# Altium PCB Final_Project.PcbDoc
Units mil, origin at the board's own origin, x right, y up, seen from the top; angles counter-clockwise.
Board outline 5410 x 3885 mil, 2 copper layers (Top Layer, Bottom Layer); 34 components, 37 nets, 146 pads, 0 vias.
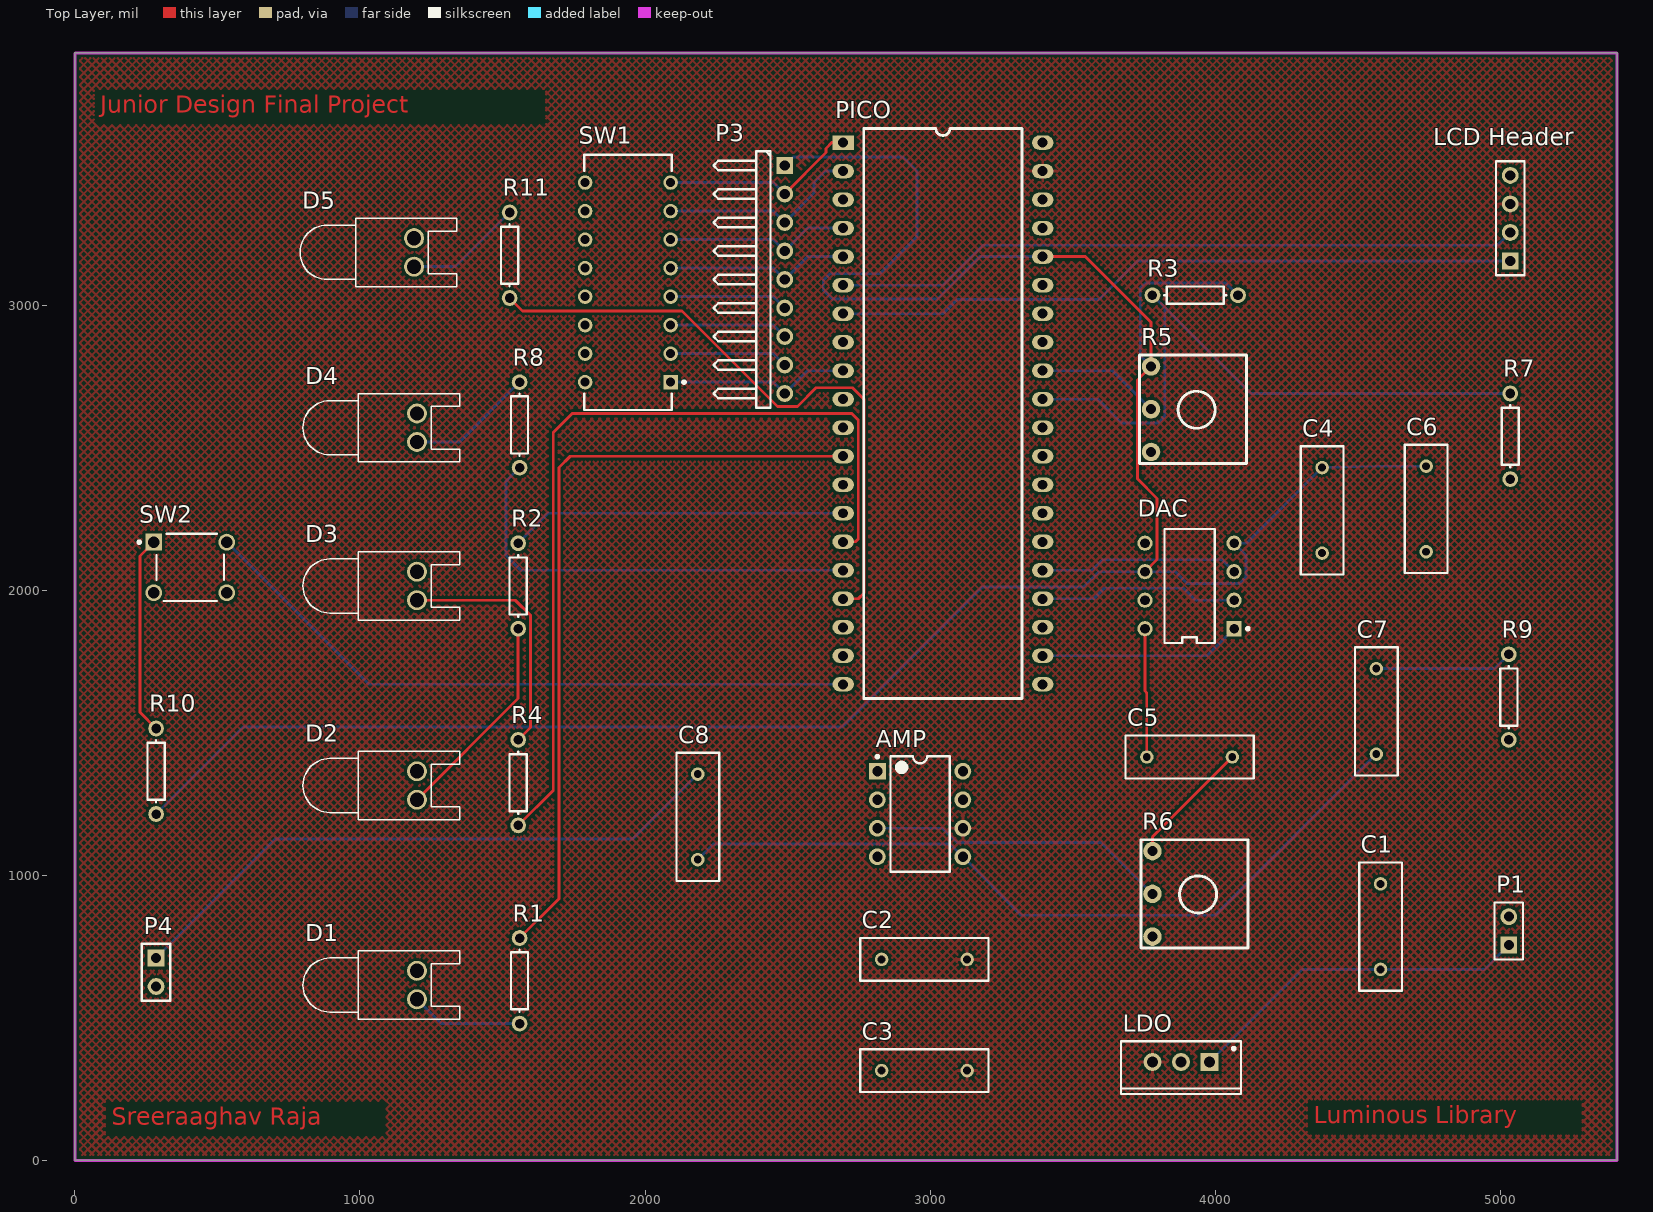
[diagram p0: Top Layer view]
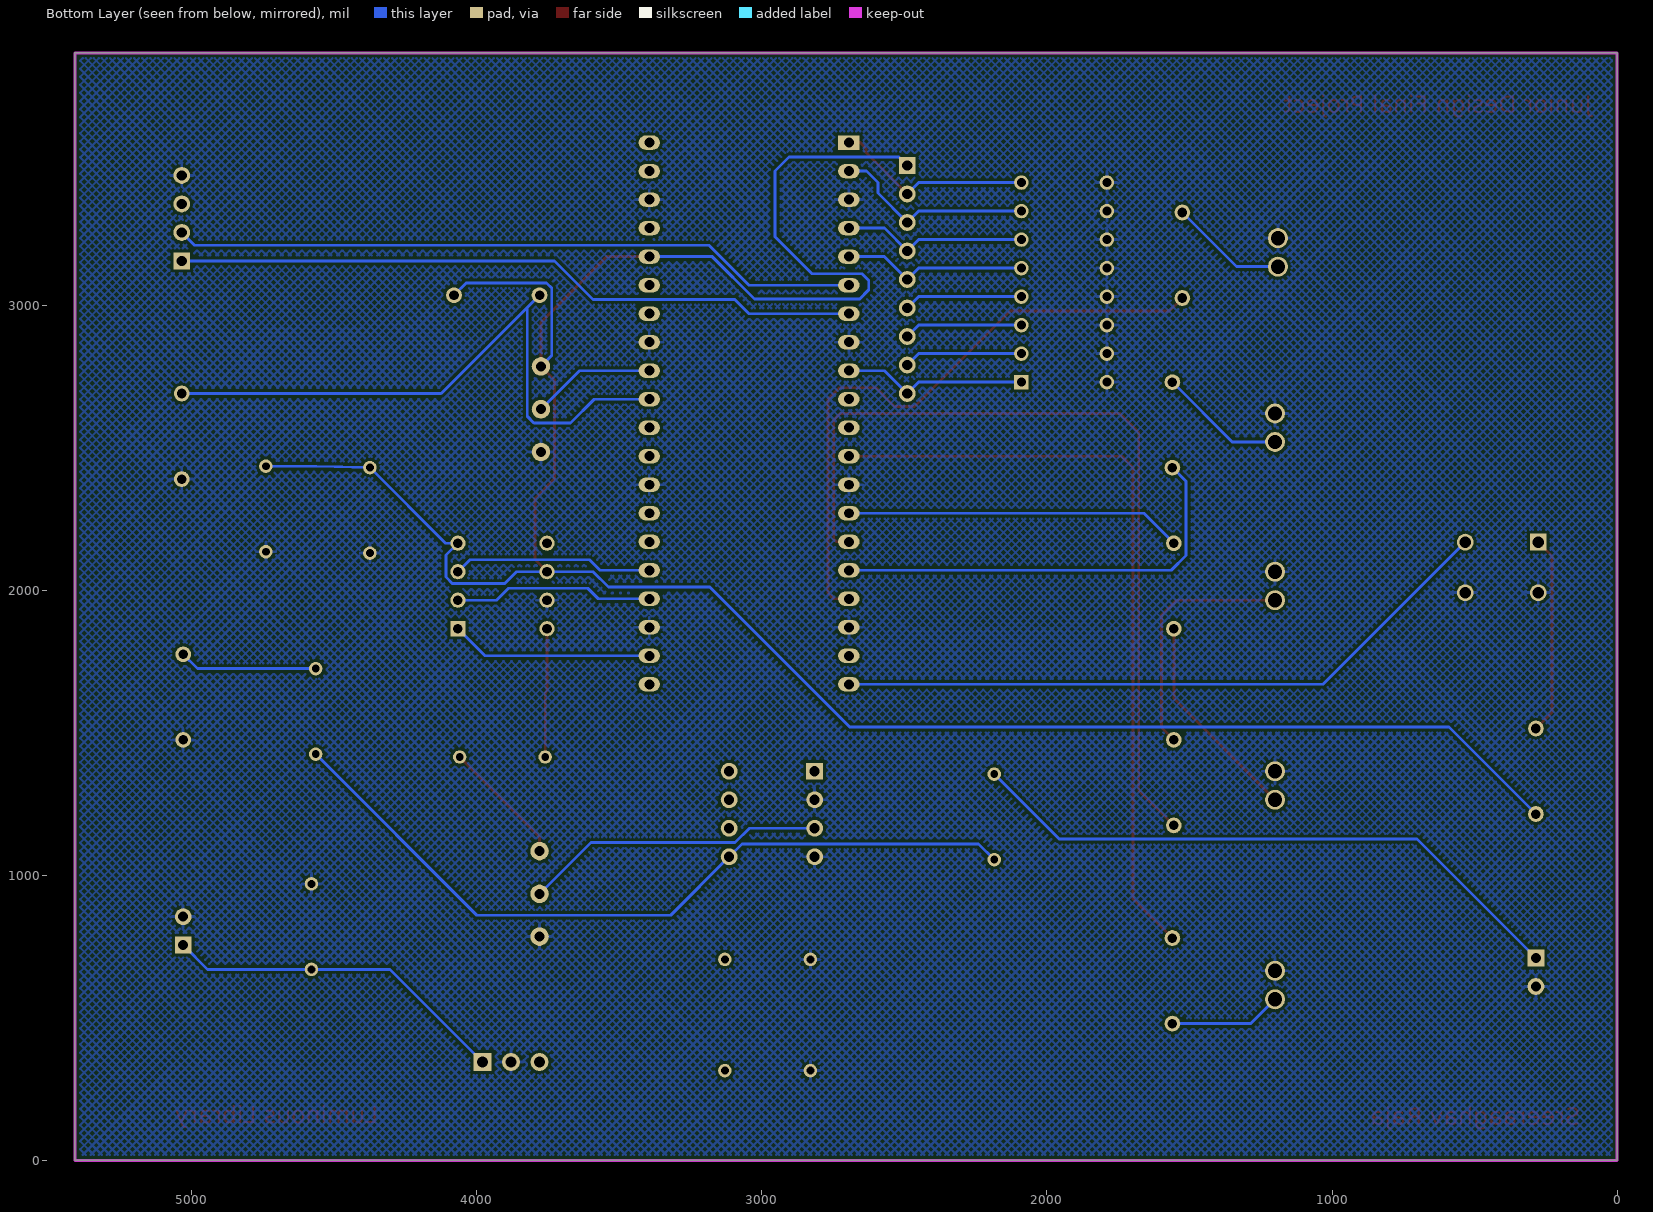
[diagram p1: Bottom Layer view, seen from below]

## Layer stack, top to bottom
Top Solder: solder mask 0.4, Solder Resist, Dk 3.5
Top Layer: signal copper 1.4
Dielectric 1: dielectric 12.6, FR-4, Dk 4.8
Bottom Layer: signal copper 1.4
Bottom Solder: solder mask 0.4, Solder Resist, Dk 3.5

## Board outline
0,0 5410,0 5410,3885 0,3885

## Design rules (kind name [scope] priority, off if disabled: settings)
Clearance [All] p1: gap=10 ignorepadtopadclearanceinfootprint=FALSE
PolygonConnect [All] p1: connectstyle=Relief reliefconductorwidth=10 reliefentries=4 polygonreliefangle="90 Angle" airgapwidth=10
RoutingVias [All] p1: holewidth=28 width=50 viastyle="Through Hole" minholewidth=28 minwidth=50 maxholewidth=28 maxwidth=50
SolderMaskExpansion [All] p1: expansion=0 istentingtop=FALSE
SupplyNets "Schematic Supply Nets_1" [InNet('9V_PORT')] p1: voltage=0.000
SupplyNets "Schematic Supply Nets" [InNet('GND_PORT')] p2: voltage=0.000
Width [All] p1: maxlimit=10 minlimit=10 preferedwidth=10
30 further rules are at their usual default settings.

## Components (designator, comment, footprint, x,y, rotation, side; value= is the part's Value field where it differs from the comment)
AMP "LM386N-1" DIP-8 2965,1215 r0 top (schematic designator U4)
C1 "Cap" RAD-0.3 4580,820 r270 top value=0.47uF
C2 "Cap" RAD-0.3 2980,705 r0 top value=10uF
C3 "Cap" RAD-0.3 2980,315 r0 top value=10uF
C4 "Cap" RAD-0.3 4375,2280 r90 top value=0.1uF
C5 "Cap" RAD-0.3 3910,1415 r180 top value=1000uF
C6 "Cap" RAD-0.3 4740,2285 r90 top value=0.1uF
C7 "Cap" RAD-0.3 4565,1575 r270 top value=0.47uF
C8 "Cap" RAD-0.3 2185,1205 r270 top value=270uF
D1 "LED0" LED-0 1200,615 r270 top
D2 "LED0" LED-0 1200,1315 r270 top
D3 "LED0" LED-0 1200,2015 r270 top
D4 "LED0" LED-0 1200,2570 r270 top
D5 "LED0" LED-0 1190,3185 r270 top
DAC "LTC1661IN8#PBF" FP-N-8-05-08-1510-MFG 3910,2015 r180 top (schematic designator U3)
"LCD Header" "LCD" HDR1X4 5035,3155 r90 top (schematic designator P2)
LDO "LM2940CT-3.3" T03B 3880,345 r180 top (schematic designator U2)
P1 "Battery Headers" HDR1X2 5030,755 r90 top
P3 "Header 9H" HDR1X9H 2490,3490 r270 top
P4 "8ohm_Speaker" HDR1X2 285,710 r270 top
PICO "Raspberry Pi Pico" "Raspberry Pi Pico" 2695,3570 r0 top (schematic designator U1)
R1 "LD" AXIAL-0.3 1560,630 r90 top value=2.2k
R2 "LD" AXIAL-0.3 1555,2015 r90 top value=2.2k
R3 "PHO" AXIAL-0.3 3930,3035 r0 top value=10K
R4 "LD" AXIAL-0.3 1555,1325 r270 top value=2.2k
R5 "RPot_1" "POT inline wide" 3775,2735 r270 top value=10K
R6 "RPot_1" "POT inline wide" 3780,1035 r270 top value=10K
R7 "Res1" AXIAL-0.3 5035,2540 r90 top value=10K
R8 "LD" AXIAL-0.3 1560,2580 r270 top value=2.2k
R9 "Res1" AXIAL-0.3 5030,1625 r90 top value=10
R10 "Res1" AXIAL-0.3 285,1365 r90 top value=1K
R11 "LD" AXIAL-0.3 1525,3175 r270 top value=2.2k
SW1 "1825360-5" FP-1825360-5-MFG 1940,3080 r180 top
SW2 "B3F-1000" OMRON-B3F-1000-4_V 405,2080 r0 top

## Footprints (in the part's own frame and the unit in brackets; to place one, negate y for a bottom-side part, rotate by r counter-clockwise, add the part's x,y. Pads: shape width x height; smd on the part's side, far side on the other; paste and mask are expansions set on the pad)
AXIAL-0.3 [mm] "Axial Device, Thru-Hole; 2 Leads; 0.3 in Pin Spacing"
  round 1.4 hole 0.85: 1(-3.81,0) 2(3.81,0)
  silkscreen extent -2.77,-0.76 2.77,0.76
DIP-8 [mm] "DIP; 8 Leads; Row Spacing 7.62 mm; Pitch 2.54 mm"
  rect 1.5x1.5 hole 0.9: 1(-3.81,3.81)
  round 1.5 hole 0.9: 2(-3.81,1.27) 3(-3.81,-1.27) 4(-3.81,-3.81) 5(3.81,-3.81) 6(3.81,-1.27) 7(3.81,1.27) 8(3.81,3.81)
  silkscreen extent -3.93,-5.15 2.65,5.23, body extent -3.6,-5.15 3.6,5.15, height 5.08
FP-1825360-5-MFG [mm]
  rect 1.29x1.29 hole 0.79 paste-2539.97 mask+0: 1(-3.81,8.89)
  round 1.29 hole 0.79 paste-2539.97 mask+0: 2(-3.81,6.35) 3(-3.81,3.81) 4(-3.81,1.27) 5(-3.81,-1.27) 6(-3.81,-3.81) 7(-3.81,-6.35) 8(-3.81,-8.89) 9(3.81,-8.89) 10(3.81,-6.35) 11(3.81,-3.81) 12(3.81,-1.27) 13(3.81,1.27) 14(3.81,3.81) 15(3.81,6.35) 16(3.81,8.89)
  silkscreen extent -5.13,-11.37 3.9,11.37, body extent -4.55,-11.48 4.55,11.48, height 0.25
FP-N-8-05-08-1510-MFG [mm]
  rect 1.35x1.35 hole 0.85 paste-2539.97 mask+0: 1(-3.969,3.81)
  round 1.35 hole 0.85 paste-2539.97 mask+0: 2(-3.969,1.27) 3(-3.969,-1.27) 4(-3.969,-3.81) 5(3.969,-3.81) 6(3.969,-1.27) 7(3.969,1.27) 8(3.969,3.81)
  silkscreen extent -5.32,-5.08 2.24,5.08, body extent -4.74,-5.31 4.74,5.31, height 0.25
HDR1X2 [mm] "Connector; Header; 2 Position"
  rect 1.5x1.5 hole 0.9: 1(0,0)
  round 1.5 hole 0.9: 2(2.54,0)
  silkscreen extent -1.27,-1.27 3.81,1.27
HDR1X4 [mm] "Connector; Header; 4 Position"
  rect 1.5x1.5 hole 0.9: 1(0,0)
  round 1.5 hole 0.9: 2(2.54,0) 3(5.08,0) 4(7.62,0)
  silkscreen extent -1.27,-1.27 8.89,1.27
HDR1X9H [mm] "Connector; Header; 9 Position; Right Angle"
  rect 1.5x1.5 hole 0.9: 1(0,0)
  round 1.5 hole 0.9: 2(2.54,0) 3(5.08,0) 4(7.62,0) 5(10.16,0) 6(12.7,0) 7(15.24,0) 8(17.78,0) 9(20.32,0)
  silkscreen extent -1.27,-6.35 21.59,-1.27
LED-0 [mil] "LED; 2 Leads"
  round 70 hole 50: 1(50,0) 2(-50,0)
  silkscreen extent -120,-400 120,150
OMRON-B3F-1000-4_V [mm] "TH, 4-Leads, Body 6x6mm"
  rect 1.5x1.5 hole 1 paste-2539.97: 1(-3.25,2.25)
  round 1.5 hole 1 paste-2539.97: 2(3.25,2.25) 4(3.25,-2.25)
  round 1.5 hole 1 paste-2539.97 mask+0.102: 3(-3.25,-2.25)
  silkscreen extent -4.67,-3 3,3, body extent -3,-3 3,3, height 4.5
"POT inline wide" [mil]
  round 65 hole 35: 1(-50,0) 2(100,0) 3(250,0)
  silkscreen extent -90,-40 290,335
RAD-0.3 [mm] "Radial Cap, Thru-Hole; 2 Leads; 0.3 in Pin Spacing"
  round 1.2 hole 0.7: 1(-3.81,0) 2(3.81,0)
  silkscreen extent -5.71,-1.91 5.71,1.91
"Raspberry Pi Pico" [mil]
  rect 75x50 hole 35: 1(0,0)
  oval 75x50 hole 35: 2(0,-100) 3(0,-200) 4(0,-300) 5(0,-400) 6(0,-500) 7(0,-600) 8(0,-700) 9(0,-800) 10(0,-900) 11(0,-1000) 12(0,-1100) 13(0,-1200) 14(0,-1300) 15(0,-1400) 16(0,-1500) 17(0,-1600) 18(0,-1700) 19(0,-1800) 20(0,-1900) 21(700,-1900) 22(700,-1800) 23(700,-1700) 24(700,-1600) 25(700,-1500) 26(700,-1400) 27(700,-1300) 28(700,-1200) 29(700,-1100) 30(700,-1000) 31(700,-900) 32(700,-800) 33(700,-700) 34(700,-600) 35(700,-500) 36(700,-400) 37(700,-300) 38(700,-200) 39(700,-100) 40(700,0)
  silkscreen extent 72,-1950 628,50
T03B [mm]
  rect 1.6x1.6 hole 1: 1(-2.54,0)
  round 1.6 hole 1: 2(0,0) 3(2.54,0)
  silkscreen extent -5.35,-1.85 5.35,2.85, body extent -5.4,-1.9 5.4,2.9, height 19.4

## Part data
AMP: "Low-Voltage Audio Power Amplifier", PackageDocument=Sep-1997, DatasheetDocument=Sep-1997, PackageReference=N08E, Published=15-Apr-2002, Publisher="Altium Limited"
C1 C2 C3 C4 C5 C6 C7 C8: "Capacitor", LatestRevisionDate=17-Jul-2002, LatestRevisionNote="Re-released for DXP Platform.", PackageDescription="Radial Cap, Thru-Hole; 2 Leads; 0.3 in Pin Spacing", PackageReference=RAD-0.3, Published=8-Jun-2000, Publisher="Altium Limited"
D1 D2 D3 D4 D5: "Typical INFRARED GaAs LED", LatestRevisionDate=08-Jul-2005, LatestRevisionNote="Mech Layer 1 removed.", PackageDescription="LED; 2 Leads", PackageReference=LED-0, Published=8-Jun-2000, Publisher="Altium Limited"
DAC: library part CMP-00026-88317689-1, "LTC1661IN8#PBF Dual Serial Input Loading 30 Us Settling Time 10-BIT Dac PDIP8", Case/Package=DIP, Manufacturer Lifecycle Status=PRODUCTION, Max Operating Temperature=85°C, Max Supply Voltage=5.5V, Min Operating Temperature=-40°C, Min Supply Voltage=2.7V, Integral Nonlinearity (INL)=2LSB, Interface=Serial, Lead Free="Lead Free", Lifecycle Status=Production, Mount="Through Hole", NexarPartId=88317689, Number of Bits=10, Number of Channels=2, Number of Converters=2, Number of Pins=8, Output Type=Voltage, Resolution=1.25B, RoHS=Compliant, Settling Time=30µs, Supply Type=Single
"LCD Header": library part "Header 4", "Header, 4-Pin", LatestRevisionDate=17-Jul-2002, LatestRevisionNote="Re-released for DXP Platform.", Publisher="Altium Limited"
LDO: library part LM2940CT-5.0, "1A Low Dropout Regulator, 3-pin TO-220", Manufacturer="National Semiconductor", PackageTopMarking="NSUZXYTTE#*LM2940CT*-5.0 P+", PowerWise=N, ComponentLink1Description="Manufacturer URL", ComponentLink1URL=http://www.national.com/, ComponentLink2Description="LM2940C Datasheet", ComponentLink2URL=http://www.national.com/ds/LM/LM2940C.pdf, ComponentLink3Description="LM2940C Web Page", ComponentLink3URL=http://www.national.com/pf/LM/LM2940C.html, ComponentLink4Description="T03B Package Page", ComponentLink4URL=http://www.national.com/packaging/folders/t03b.html, CompType="LDO IC", DatasheetVersion=Jan-2007, High-Reliability=Y, PackageDescription="TO-220, Molded, 3 Lead, Straight", PackageReference=T03B, PackageVersion="revL, Jan-1992", PartNumber=LM2940CT-3.3, PinCount=3, RoHS=N
P1 P4: library part "Header 2", "Header, 2-Pin", LatestRevisionDate=17-Jul-2002, LatestRevisionNote="Re-released for DXP Platform.", Publisher="Altium Limited"
P3: "Header, 9-Pin, Right Angle", LatestRevisionDate=17-Jul-2002, LatestRevisionNote="Re-released for DXP Platform.", Publisher="Altium Limited"
R1 R2 R3 R4 R8 R11: library part Res1, "Resistor", LatestRevisionDate=17-Jul-2002, LatestRevisionNote="Re-released for DXP Platform.", PackageDescription="Axial Device, Thru-Hole; 2 Leads; 0.3 in Pin Spacing", PackageReference=AXIAL-0.3, Published=8-Jun-2000, Publisher="Altium Limited"
R5 R6: library part RPot_3, "Potentiometer", LatestRevisionDate=17-Jul-2002, LatestRevisionNote="Re-released for DXP Platform.", PackageDescription="Variable Resistor, Thru-Hole; 3 Leads", PackageReference=VR5, Published=8-Jun-2000, Publisher="Altium Limited", Set Position=0.5, Sim Note="Enter the Resistance value and the set point into parameter fields."
R7 R9 R10: "Resistor", LatestRevisionDate=17-Jul-2002, LatestRevisionNote="Re-released for DXP Platform.", PackageDescription="Axial Device, Thru-Hole; 2 Leads; 0.3 in Pin Spacing", PackageReference=AXIAL-0.3, Published=8-Jun-2000, Publisher="Altium Limited"
SW1: library part CMP-03400-000027-1, "SWITCH SLIDE DIP SPST 100MA 24V", Contact Current Rating=1A, Contact Resistance=50mR, Flammability Rating="UL94 V-0", Housing Color=Black, Max Current Rating=100mA, Max Operating Temperature=85°C, Max Voltage Rating (DC)=24V, Min Operating Temperature=-30°C, Package Quantity=20, Voltage Rating (DC)=5V, Actuator Length=0.99mm, Actuator Material=Polybutylene, Actuator Type="Slide (Standard)", Body Material=Polyphenylene, Contact Material="Copper Alloy", Contact Plating=Gold, Contact Post Length=4mm, Electrical Life=1000Cycles, ELV=Compliant, Height=0.138inch, Housing Material=Polyphenylene, Length=0.876inch, Mechanical Life=1000Cycles, Mount="Through Hole", Number of Circuits=8, Number of Positions=8, Orientation=Straight, Packaging=Rail/Tube, Pitch=0.1inch, Radiation Hardening=No, RoHS Compliant=Yes, Sealable="No (Without)", Series=ADE, Terminal Pitch=2.54mm, Termination="PC Pins", Throw Configuration=SPST, Type=Switch, Washable=Yes
SW2: library part CMP-1677-00002-1, "Tactile Switch, SPST-NO, 0.05 A, 5 to 24 V, -25 to 70 degC, 4-Pin THD, RoHS, Bulk", Capacitance="-45 f", Current Rating="1.5 A", Max Operating Temperature="70 degC", Min Operating Temperature="-40 degC", Package Quantity=1080, Voltage Rating="150 V", ComponentLink1Description="Manufacturer URL", ComponentLink1URL=http://www.omron.com/, ComponentLink2Description=Datasheet, ComponentLink2URL=http://www.omron.com/ecb/products/pdf/en-b3f.pdf, Contact Material=Brass, Contact Plating=Gold, DatasheetVersion=Jan-15, Gender=Female, Height="14.99 mm", Lead Pitch="1.27 mm", Length="18.34 mm", Mount="Through Hole", PackageDescription="4-Pin Through Hole Device, Body 6 x 6 mm", PackageReference=B3F-1000, Packaging=Tray, Pins=8, Radiation Hardening=No, RoHSCompliant=true, Shielding=Shielded, Width="25.4 mm"

## Nets (pads, with @x,y where several pads share a name; then routed paths per layer and width w, separated by ;. In a path a pad name is that pad's centre, name@x,y a point inside that pad or via, vN(x,y) a via of type N, cw(c..) or ccw(c..) an arc to the next point about the centre after c; other vN are vias at no path point)
3V3_PORT: C4.2 C6.2 DAC.4 DAC.6 P3.1 PICO.36 R3.2 R5.1 R10.1 | length 9194.2
  Top Layer w10: PICO.36 3545,3170 3775,2940 R5.1 3727,2737 3727,2391 3796,2322 3796,2107.25 DAC.6
  Bottom Layer w10: R10.1 590,1520 2692,1520 3183,2011 3538,2011 3592,2065 DAC.6 3861,2065 3903,2023 4085,2023 4108,2046 4108,2123.25 DAC.4 4110,2165 C4.2 4563,2435 C6.2 ; P3.1 2520,3520 2905,3520 2954,3471 2954,3240 2824,3110 2649,3110 2625,3086 2625,3054 2657,3022 3026,3022 3174,3170 PICO.36 ; R5.1 3737,2823 3737,3060 3755,3078 4037,3078 R3.2
5V_PORT: "LCD Header.3" AMP.6 C2.2 C3.2 LDO.3 PICO.39
9V_PORT: C1.2 LDO.1 P1.1 | length 1219.8
  Bottom Layer w10: LDO.1 4305,670 C1.2 4945,670 P1.1
ADC0: PICO.31 R3.1 R7.2 | length 2251.8
  Bottom Layer w10: PICO.31 3588,2670 3671,2587 3800,2587 3823,2610 3823,2992 ; R3.1 3823,2992 ; R7.2 4125,2690 3823,2992
ADC1: PICO.32 R5.2 | length 435.9
  Bottom Layer w10: PICO.32 3640,2770 R5.2
AMP_IN: AMP.3 R6.2 | length 1060.3
  Bottom Layer w10: AMP.3 3044,1165 3094,1115 3600,1115 R6.2
CAP_OUT: C5.1 R6.1 | length 446
  Top Layer w10: R6.1 3780,1135 C5.1
CS: DAC.1 PICO.22 | length 710.6
  Bottom Layer w10: PICO.22 3971.25,1770 DAC.1
GND_PORT: "LCD Header.4" AMP.2 AMP.4 C1.1 C2.1 C3.1 C4.1 C6.1 D1.2 D2.2 D3.2 D4.2 D5.2 DAC.7 LDO.2 P1.2 P4.2 PICO.3 PICO.8 PICO.13 PICO.18 PICO.23 PICO.28 PICO.33 PICO.38 R5.3 R6.3 R7.1 R9.1 SW1.9 SW1.10 SW1.11 SW1.12 SW1.13 SW1.14 SW1.15 SW1.16 SW2.3 SW2.4
GP0: P3.2 PICO.1 SW1.8 | length 704.9
  Top Layer w10: P3.2 2635,3535 2635,3550 2655,3570 PICO.1
  Bottom Layer w10: SW1.8 2450,3430 P3.2
GP1: P3.3 PICO.2 SW1.7 | length 717.8
  Bottom Layer w10: SW1.7 2450,3330 P3.3 2593,3393 2593,3430 2633,3470 PICO.2
GP2: P3.4 PICO.4 SW1.6 | length 654.7
  Bottom Layer w10: SW1.6 2450,3230 P3.4 2570,3270 PICO.4
GP3: P3.5 PICO.5 SW1.5 | length 654.7
  Bottom Layer w10: SW1.5 2450,3130 P3.5 2570,3170 PICO.5
GP6: P3.9 PICO.9 SW1.1 | length 654.7
  Bottom Layer w10: SW1.1 2450,2730 P3.9 2570,2770 PICO.9
GP9: PICO.12 R1.2 | length 2720.7
  Top Layer w10: R1.2 1698,918 1698,2430 1738,2470 PICO.12
GP10: PICO.14 R2.2 | length 1183.5
  Bottom Layer w10: R2.2 1660,2270 PICO.14
GP11: PICO.15 R4.2 | length 3010.4
  Top Layer w10: R4.2 1678,1298 1678,2553 1745,2620 2725,2620 2748,2597 2748,2180 2738,2170 PICO.15
GP12: PICO.16 R8.2 | length 1532.4
  Bottom Layer w10: R8.2 1512,2382 1512,2122 1564,2070 PICO.16
GP13: PICO.17 R11.2 | length 2205.2
  Top Layer w10: R11.2 1570,2980 2130,2980 2465,2645 2535,2645 2600,2710 2728,2710 2768,2670 2768,1990 2748,1970 PICO.17
GP15: PICO.20 SW2.2 | length 2368.6
  Bottom Layer w10: SW2.2 1031.53,1670 PICO.20
MOSI: DAC.3 PICO.25 | length 704
  Bottom Layer w10: PICO.25 3568,2070 3605,2107 4024.25,2107 DAC.3
NetC5_2: C5.2 DAC.8 | length 452.6
  Top Layer w10: DAC.8 3753.75,1646.25 3760,1640 C5.2
NetC7_1: C7.1 R9.2 | length 485.7
  Bottom Layer w10: C7.1 4980,1725 R9.2
NetC7_2: AMP.5 C7.2 C8.2 | length 2740.4
  Bottom Layer w10: C8.2 2240,1110 3070,1110 AMP.5 3320,860 4000,860 C7.2
NetD1_1: D1.1 R1.1 | length 395.2
  Bottom Layer w10: D1.1 1285,480 R1.1
NetD2_1: D2.1 R2.1 | length 747
  Top Layer w10: D2.1 1555,1620 R2.1
NetD3_1: D3.1 R4.1 | length 874.8
  Top Layer w10: D3.1 1545,1965 1598,1912 1598,1518 R4.1
NetD4_1: D4.1 R8.1 | length 447
  Bottom Layer w10: D4.1 1350,2520 R8.1
NetD5_1: D5.1 R11.1 | length 413.7
  Bottom Layer w10: D5.1 1335,3135 R11.1
NetP3_6: P3.6 SW1.4 | length 416.6
  Bottom Layer w10: SW1.4 2450,3030 P3.6
NetP3_7: P3.7 SW1.3 | length 416.6
  Bottom Layer w10: SW1.3 2450,2930 P3.7
NetP3_8: P3.8 SW1.2 | length 416.6
  Bottom Layer w10: SW1.2 2450,2830 P3.8
NetR10_2: R10.2 SW2.1 | length 697.5
  Top Layer w10: SW2.1 228,2119.53 228,1572 R10.2
SCK: DAC.2 PICO.24 | length 704
  Bottom Layer w10: PICO.24 3574,1970 3611,2007 3889,2007 3931,1965 DAC.2
SCL: "LCD Header.1" PICO.7 | length 2416.6
  Bottom Layer w10: PICO.7 3045,2970 3095,3020 3592,3020 3727,3155 5035,3155
SDA: "LCD Header.2" PICO.6 | length 2416.6
  Bottom Layer w10: PICO.6 3045,3070 3185,3210 4990,3210 5035,3255
SPK_IN: C8.1 P4.1 | length 2167.2
  Bottom Layer w10: P4.1 702,1127 1957,1127 C8.1
pads on no net: AMP.1 AMP.7 AMP.8 DAC.5 PICO.10 PICO.11 PICO.19 PICO.21 PICO.26 PICO.27 PICO.29 PICO.30 PICO.34 PICO.35 PICO.37 PICO.40

## Polygon pours and split planes (outlines as drawn)
5V_PORT on Top Layer "5V_PORT_L01_P000" (hatched 45Degree grid 20 track 8, pour order 0): 0.24,3884.4 0.85,3885 5410,3885 5410,0 0,0 0,5 -5,10
GND_PORT on Bottom Layer "GND_PORT_L02_P001" (hatched 45Degree grid 20 track 8, pour order 1): 0,3885 5410,3885 5410,0 0,0 0,5

## Keep-outs
Keep-Out Layer:
  the board outline again, w10

## Other copper
Top Layer:
  text "Junior Design Final Project" at 90,3674.99 h60
  text "Luminous Library" at 4345,129.99 h60
  text "Sreeraaghav Raja" at 130,124.99 h60